# EAGLE board reflip_sen_1.0 (EAGLE 8.7.0)
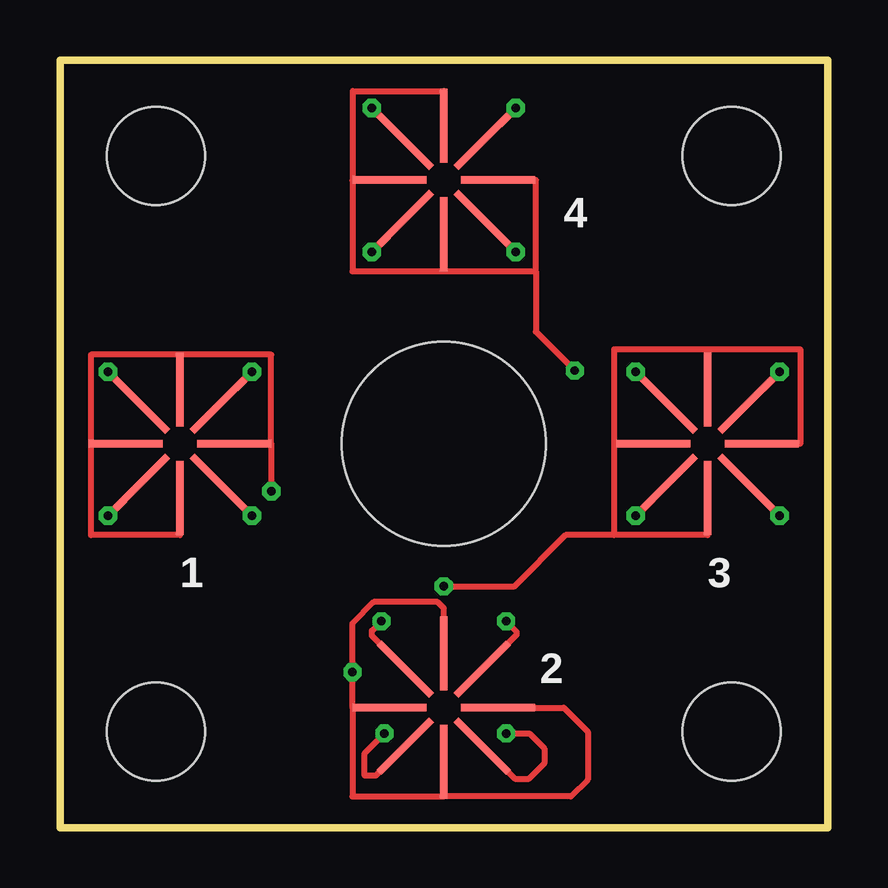
[diagram p0: board, top side]
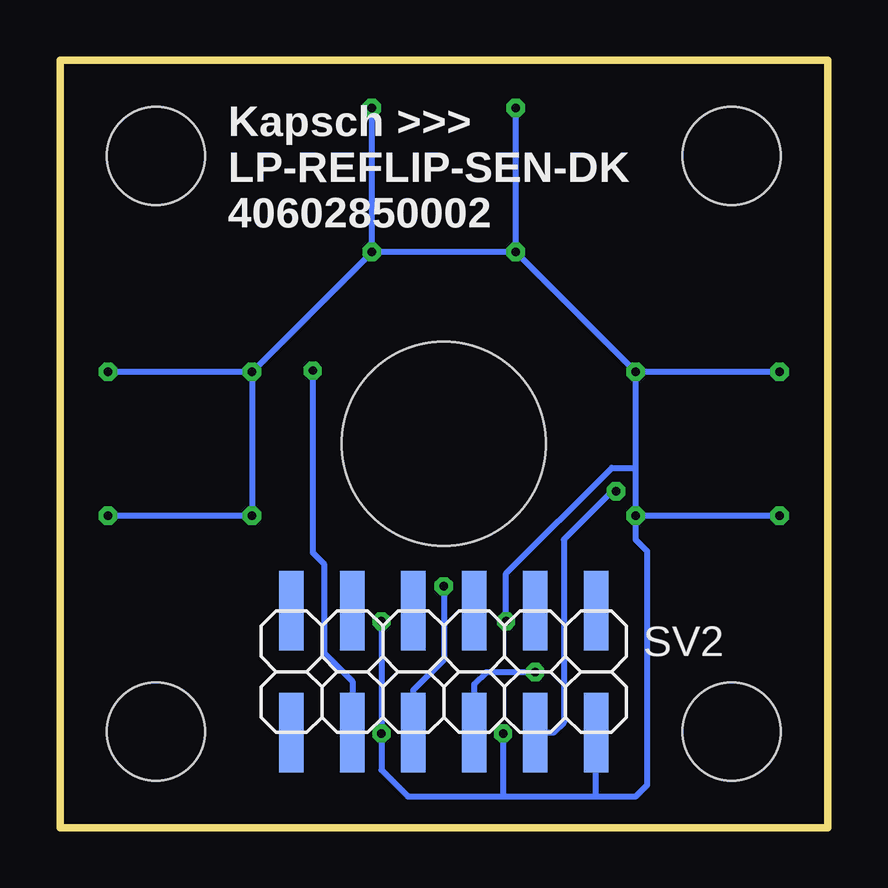
[diagram p1: board, bottom side, seen from below]

Size 32 x 32 mm. Coordinates in mm from the lower left corner, seen from the top.
Outline: 0,0 32,0 32,32 0,32 0,0
Copper layers (1*16): Top 0.035mm / dielectric 1.5mm / Bottom 0.035mm
Design rules "default *": minimum track width 6mil, minimum drill 0.35mm, track to track 6mil, track to pad 6mil, pad to pad 6mil, via to via 6mil, smd to smd 6mil, copper to edge 30mil, drill to drill 6mil, minimum pad ring 10mil, minimum via ring 8mil, stop-mask expansion 4mil, vias tented up to drill 16mil, thermal gap 10mil
Holes 8.5 mm at 16,16
Holes 4.1 mm at 4,28 28,28 4,4 28,4

## Footprints (pad centres in the part's own frame; a part is rotated, then mirrored left to right if it is on the bottom)
2X06SMD = smd 1.016 x 3.302: 1 -6.35,-2.54; 2 -6.35,2.54; 3 -3.81,-2.54; 4 -3.81,2.54; 5 -1.27,-2.54; 6 -1.27,2.54; 7 1.27,-2.54; 8 1.27,2.54; 9 3.81,-2.54; 10 3.81,2.54; 11 6.35,-2.54; 12 6.35,2.54
KONTAKTFLAECHE = smd 0.305 x 3.1: A1 0,2.261; A3 0,-2.261 | smd 3.1 x 0.305: A2 -2.261,0; A4 2.261,0 | smd 3.1 x 0.305 rotated 135: B1 -1.6,1.6; B3 1.6,-1.6 | smd 3.1 x 0.305 rotated 45: B2 -1.6,-1.6; B4 1.6,1.6

## Placement (x,y rotation side)
SV2  [2X06SMD]  16,6.5 180 bottom
U$1  KONTAKTFLAECHE  [KONTAKTFLAECHE]  5,16 90 top
U$2  KONTAKTFLAECHE  [KONTAKTFLAECHE]  16,27 0 top
U$3  KONTAKTFLAECHE  [KONTAKTFLAECHE]  16,5 0 top
U$4  KONTAKTFLAECHE  [KONTAKTFLAECHE]  27,16 0 top

## Library data of the parts
SV2 U$1-U$4 = 000_FlipMouse

## Nets
N$1: SV2.10 U$2.A1 U$2.A2 U$2.A3 U$2.A4
N$2: SV2.8 U$4.A1 U$4.A2 U$4.A3 U$4.A4
N$4: SV2.4 U$1.A1 U$1.A2 U$1.A3 U$1.A4
N$7: SV2.6 U$3.A1 U$3.A2 U$3.A3 U$3.A4
N$8: SV2.2 U$1.B1 U$1.B2 U$1.B3 U$1.B4 U$2.B1 U$2.B2 U$2.B3 U$2.B4 U$3.B1 U$3.B2 U$3.B3 U$3.B4 U$4.B1 U$4.B2 U$4.B3 U$4.B4

## Tracks (layer width: path | path; a pad name or v marks a point on that pad's centre or on a via)
N$1  (via drill 0.35)
  Top 0.254: U$2.A3 16,23.19 | U$2.A2 12.22,27 | 12.22,27 12.19,26.98 12.19,23.19 16,23.19 | 12.22,27 12.22,30.7 16,30.7 U$2.A1 | 16,23.19 19.84,23.19 | 19.84,23.19 19.84,27 | 19.84,27 | 19.84,27 U$2.A4 | 19.84,23.19 19.84,20.68 v21.46,19.05
  Bottom 0.254: v21.46,19.05 21.46,11.46 21,11 21,7.28 19.81,6.1 SV2.10
N$2  (via drill 0.35)
  Top 0.254: U$4.A2 23.11,16 | 23.11,16 23.11,19.94 27,19.94 | 27,19.94 U$4.A1 | 27,19.94 30.86,19.94 30.86,16 U$4.A4 | U$4.A3 27,12.19 23.11,12.19 | 23.11,12.19 23.11,16 | 23.11,12.19 21.08,12.19 18.92,10.03 16.02,10.03 v16,10.06
  Bottom 0.254: v16,10.06 16,7 17.27,5.73 SV2.8
N$4  (via drill 0.35)
  Top 0.254: U$1.A1 1.29,16 | 1.29,16 1.29,19.71 5,19.71 | U$1.A4 5,19.71 | U$1.A3 8.81,16 | 8.81,16 | 8.81,16 8.81,19.71 5,19.71 | 1.29,16 1.29,12.19 5,12.19 | 8.81,16 8.81,13.99 v8.81,14.02 | U$1.A2 5,12.19 | 5,12.19
  Bottom 0.254: SV2.4 11.41,3.96 11,4.37 11,12 8.98,14.02 v8.81,14.02
N$7  (via drill 0.35)
  Top 0.254: 12.19,5 U$3.A2 12.19,5 | 12.19,5 12.19,1.29 16,1.29 | 16,1.29 U$3.A3 | 19.81,5 U$3.A4 21,5 22,4 22,2 21.3,1.29 16,1.29 | 12.19,5 v12.19,6.48 12.19,8.51 13.08,9.4 15.75,9.4 16,9.14 U$3.A1
  Bottom 0.254: 14.73,5 SV2.6 14.73,5.97 14.22,6.48 v12.19,6.48
N$8  (via drill 0.35)
  Top 0.254: 17.35,6.35 U$3.B4 19.05,8.05 19.05,8.15 v18.6,8.6 | v13.53,3.92 12.7,3.1 12.7,2.16 13.16,2.16 U$3.B2 | v18.6,3.92 19.57,3.92 20.19,3.3 20.19,2.67 19.56,2.03 18.97,2.03 U$3.B3 | U$3.B1 13,8 13,8.2 v13.4,8.6
  Top 0.305: U$1.B4 v2,19 | v2,13 U$1.B1 | v8,13 U$1.B2 | v8,19 U$1.B3 | v13,24 U$2.B2 | v19,24 U$2.B3 | v19,30 U$2.B4 | v13,30 U$2.B1 | v24,19 U$4.B1 | v30,19 U$4.B4 | v24,13 U$4.B2 | v30,13 U$4.B3
  Bottom 0.254: v2,13 v8,13 | v2,19 v8,19 | v8,13 8,15 | 8,15 v8,19 | v8,19 v13,24 | v13,24 v19,24 | v19,24 v19,30 | v13,24 v13,30 | v19,24 v24,19 | v24,19 v30,19 | v24,19 v24,13 v30,13 | SV2.2 9.65,1.32 9.63,1.29 | 13.46,1.29 17.5,1.29 18.6,2.4 v18.6,3.92 v18.6,8.6 | 13.46,1.29 9.63,1.29 | v8,13 8,12 7.52,11.52 7.52,1.78 8,1.29 9.63,1.29 | v13.4,8.6 13.4,10.6 9,15 8,15 | v13.53,3.92 13.53,1.36 13.46,1.29

## Text on the board
tPlace: 4 | 1 | 3 | 2
bPlace: Kapsch >>> / LP-REFLIP-SEN-DK / 40602850002